# Altium PCB BooMo_ConV2.0.PcbDoc
Units mil, origin at the board's own origin, x right, y up, seen from the top; angles counter-clockwise.
Board outline 3937.01 x 3937.01 mil, 2 copper layers (Top Layer, Bottom Layer); 132 components, 111 nets, 512 pads, 168 vias.
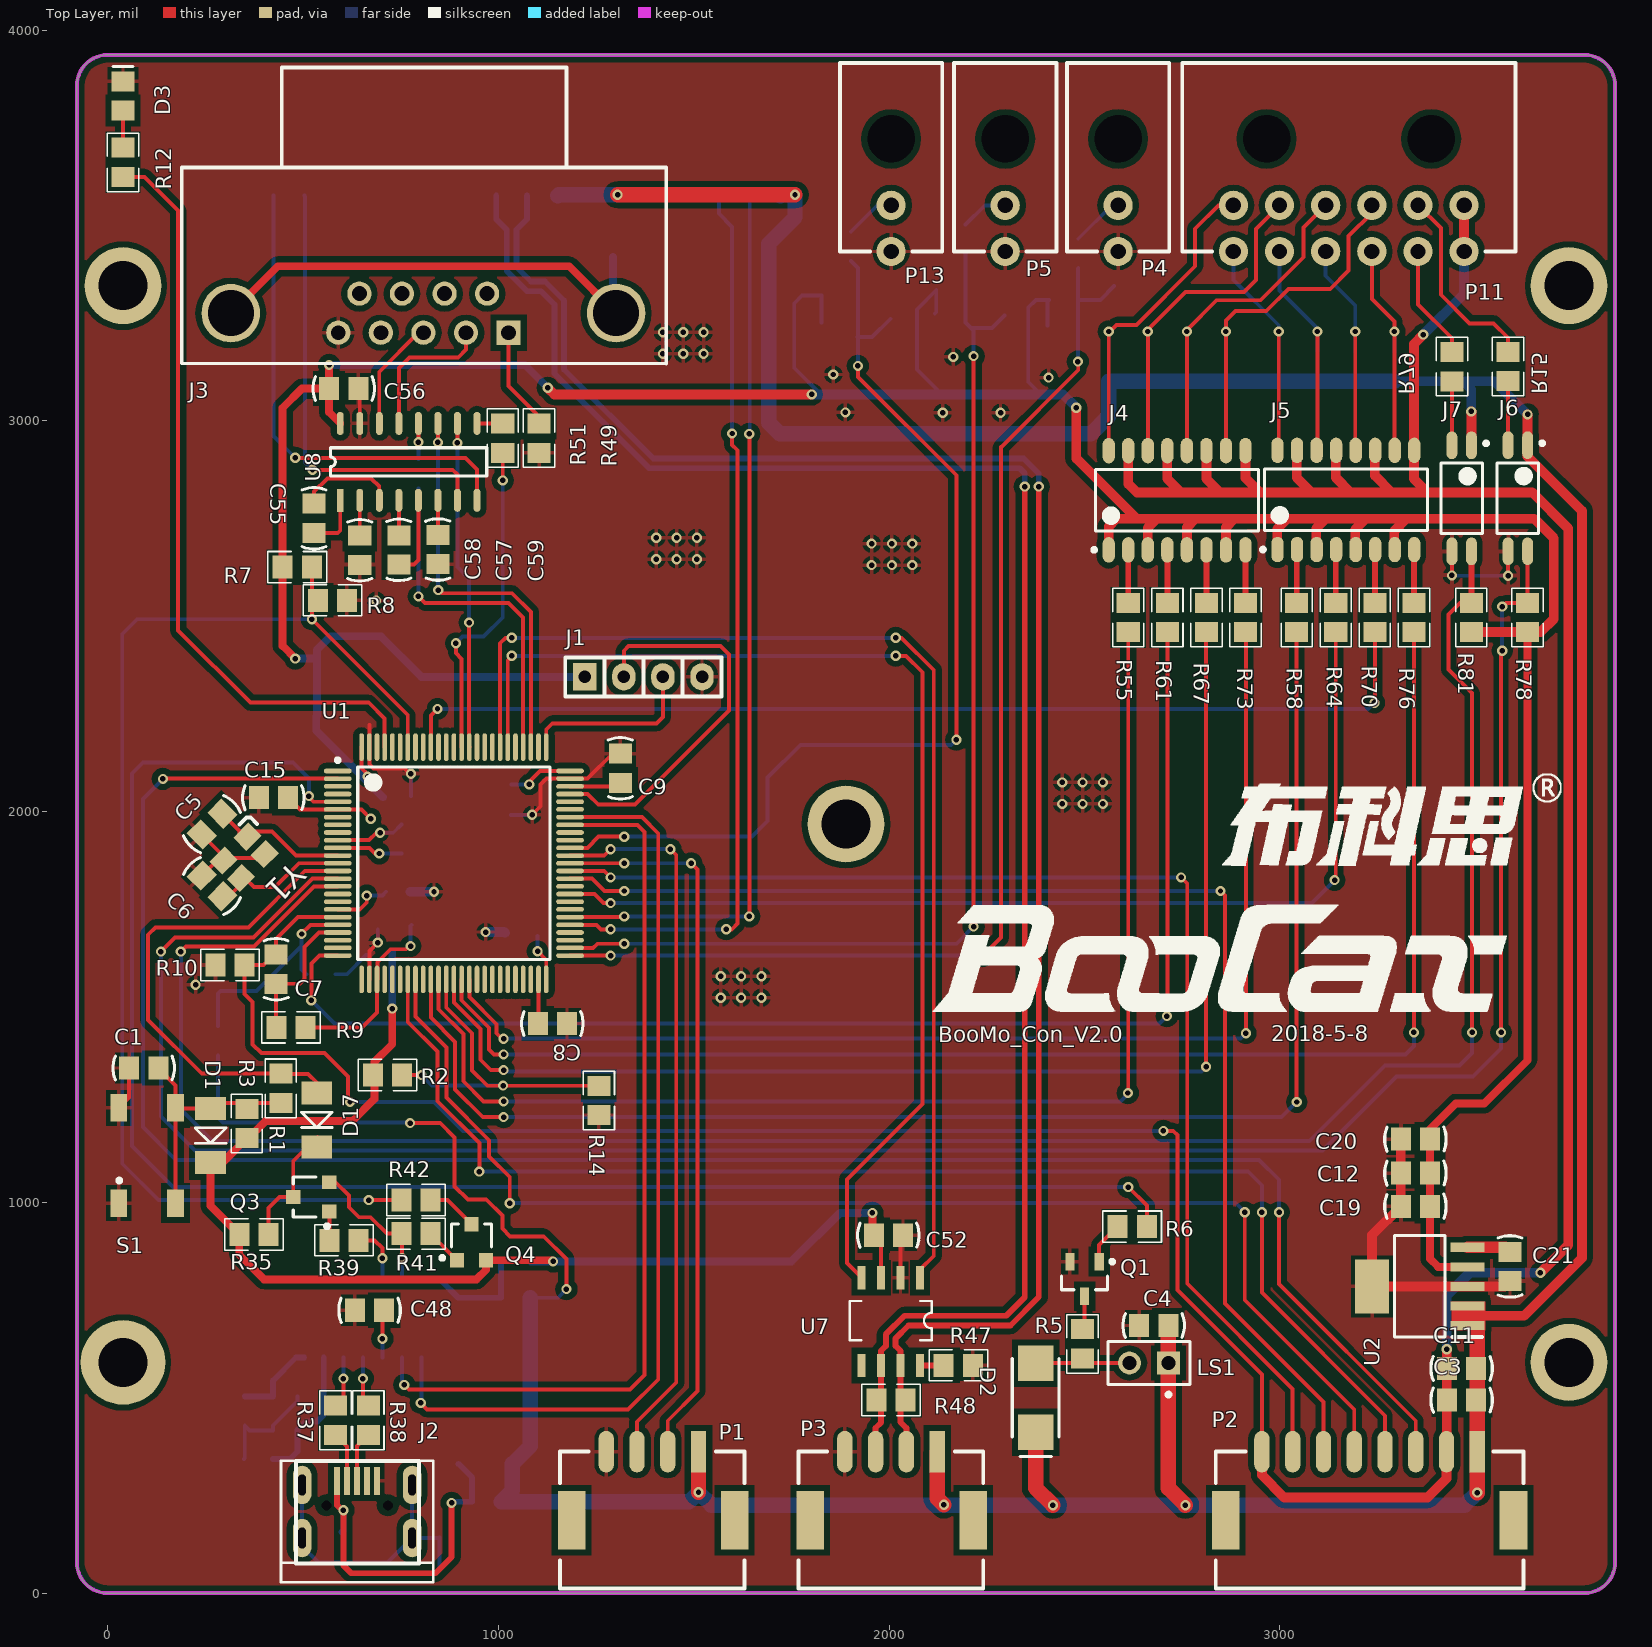
[diagram p0: Top Layer view]
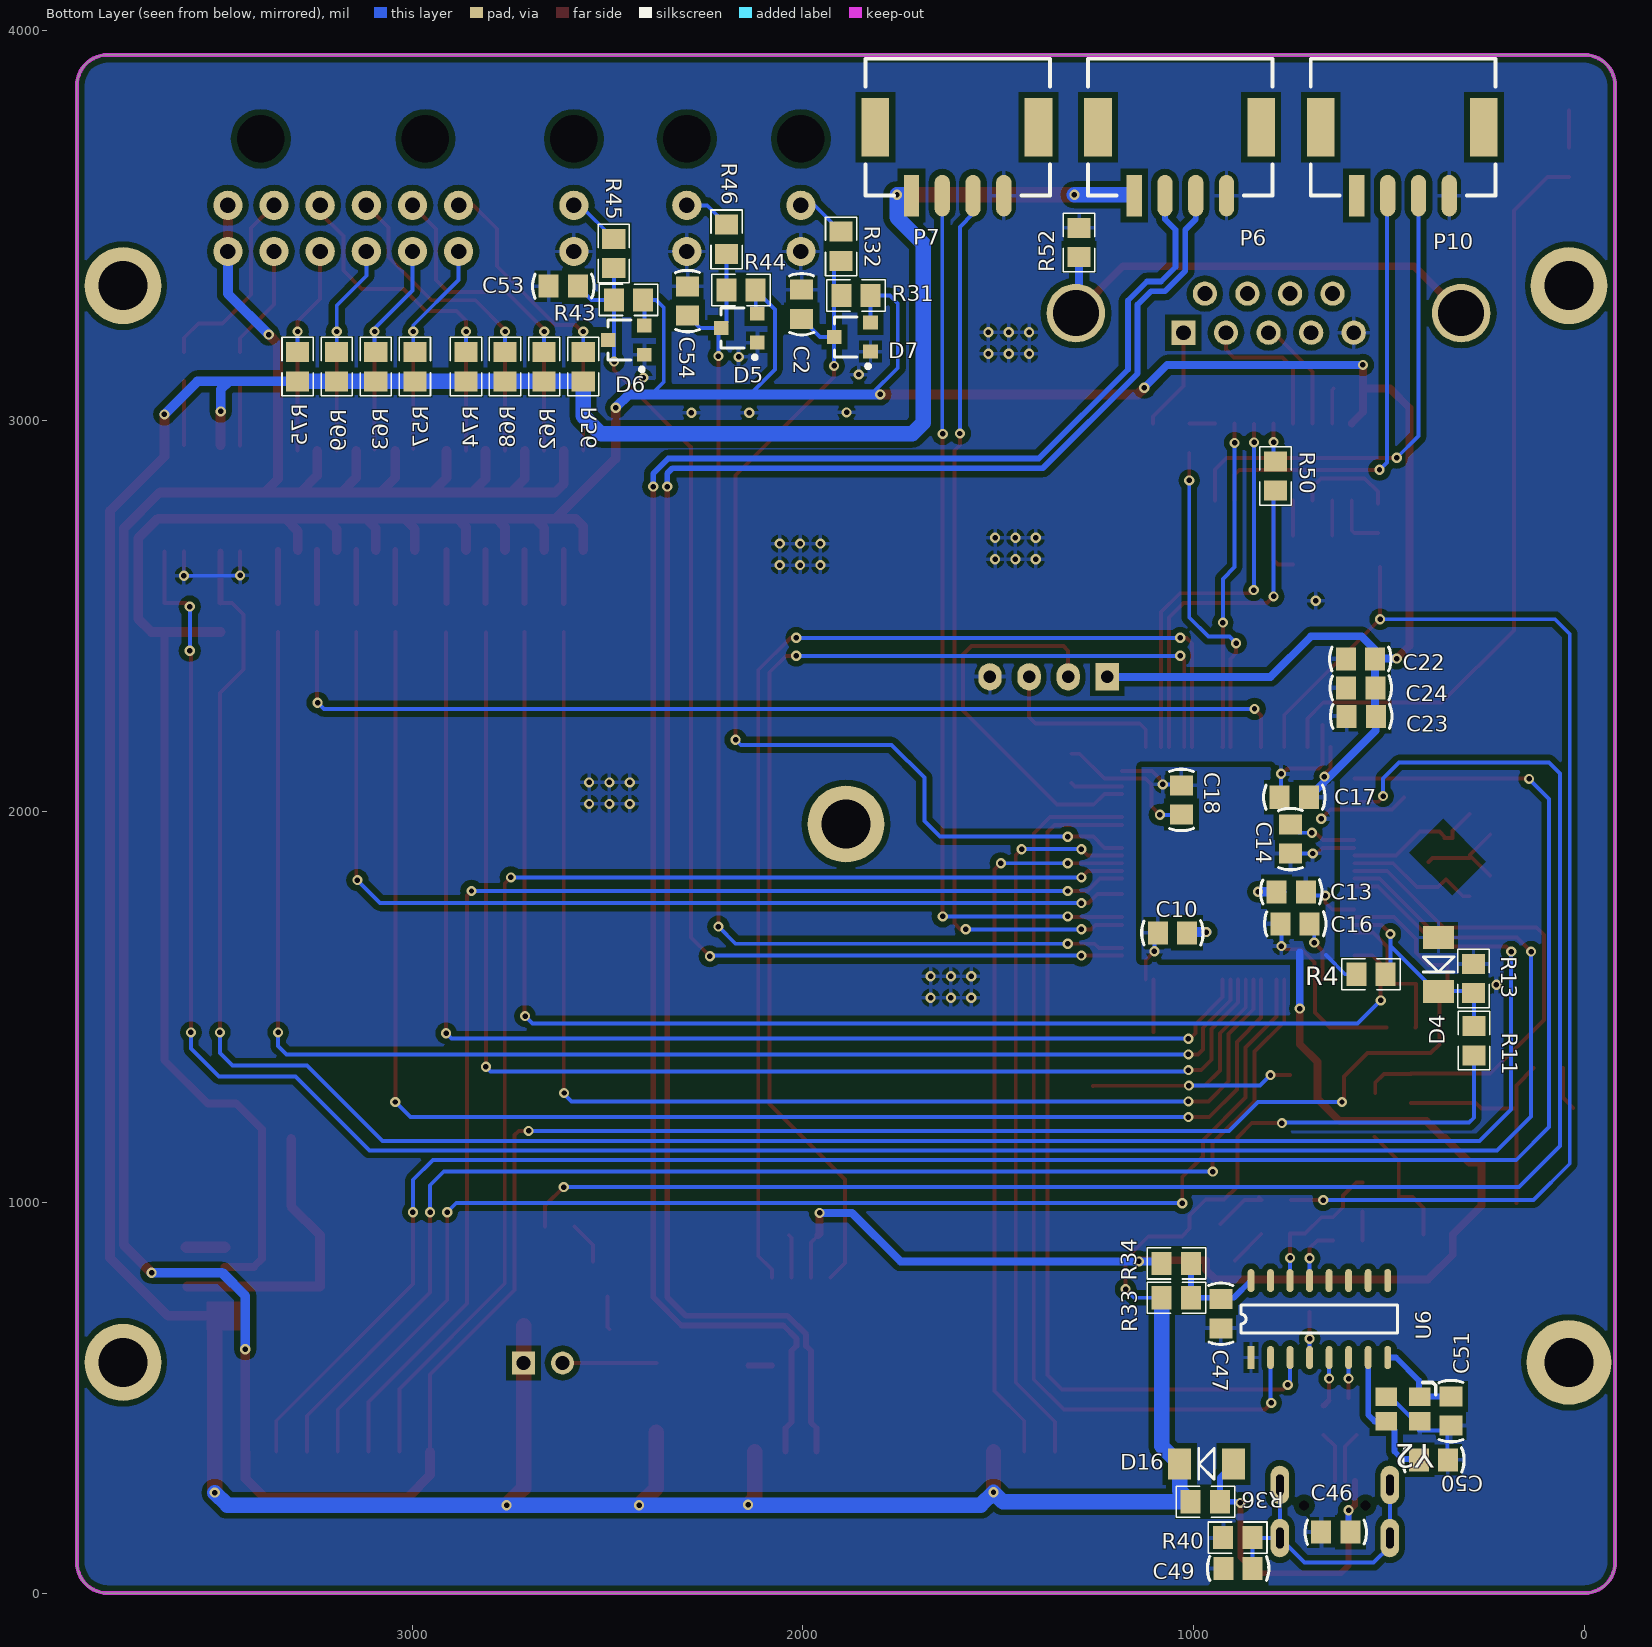
[diagram p1: Bottom Layer view, seen from below]

## Layer stack, top to bottom
Top Solder: solder mask 0.4, Solder Resist, Dk 3.5
Top Layer: signal copper 1.4
Dielectric1: prepreg 12.6, FR-4, Dk 4.8
Bottom Layer: signal copper 1.4
Bottom Solder: solder mask 0.4, Solder Resist, Dk 3.5

## Board outline
-78.74,78.74 -78.74,3858.27 cw(c0,3858.27) 0,3937.01 3779.53,3937.01 cw(c3779.53,3858.27) 3858.27,3858.27 3858.27,78.74 cw(c3779.53,78.74) 3779.53,0 0,0 cw(c0,78.74)

## Design rules (kind name [scope] priority, off if disabled: settings)
Clearance [All] p1: gap=7 except(10: Arc-Arc SMDPad-Via; 15: Arc-Poly Track-Poly SMDPad-Poly THPad-Poly Via-Poly Fill-Poly Poly-Poly)
ComponentClearance [All] p1 off: gap=10 collisioncheckmode=3 verticalgap=10 showdistances=FALSE
DiffPairsRouting [All] p1: maxlimit=10 minlimit=7 mostfreqgap=10 toplayer_minwidth=10 toplayer_maxwidth=15 toplayer_prefwidth=15 bottomlayer_minwidth=10 bottomlayer_maxwidth=15 bottomlayer_prefwidth=15 maxuncoupledlength=500
Height [All] p1: minheight=0 maxheight=2000 prefheight=500
HoleSize [All] p1: absolutevalues=TRUE maxlimit=500 minlimit=1 maxpercent=80.000 minpercent=20.000
HoleToHoleClearance [All] p1: gap=0 allowstackedmicrovias=TRUE
MinimumSolderMaskSliver [All] p1: minsoldermaskwidth=1
PlaneConnect [All] p1: planeconnectstyle=Direct reliefexpansion=20 reliefentries=4 reliefconductorwidth=10 reliefairgap=10
PolygonConnect G [InNet('GND')] p1: connectstyle=Direct reliefconductorwidth=10 reliefentries=4 polygonreliefangle="90 Angle" airgapwidth=10
PolygonConnect NETD4_2 [InNet('NetD4_2')] p2: connectstyle=Direct reliefconductorwidth=10 reliefentries=4 polygonreliefangle="90 Angle" airgapwidth=10
PolygonConnect NETD4 [InNet('NetC13_2')] p3: connectstyle=Direct reliefconductorwidth=10 reliefentries=4 polygonreliefangle="90 Angle" airgapwidth=10
PolygonConnect NETD3_2 [InNet('NetD3_2')] p4: connectstyle=Direct reliefconductorwidth=10 reliefentries=4 polygonreliefangle="90 Angle" airgapwidth=10
PolygonConnect RELAY_IN [InNet('RELAY_IN')] p5: connectstyle=Direct reliefconductorwidth=10 reliefentries=4 polygonreliefangle="90 Angle" airgapwidth=10
PolygonConnect VCC_24V [InNet('VCC_24V')] p6: connectstyle=Direct reliefconductorwidth=10 reliefentries=4 polygonreliefangle="90 Angle" airgapwidth=10
PolygonConnect BATTIN [InNet('BATTIN')] p7: connectstyle=Direct reliefconductorwidth=10 reliefentries=4 polygonreliefangle="90 Angle" airgapwidth=10
PolygonConnect [All] p8: connectstyle=Relief reliefconductorwidth=10 reliefentries=4 polygonreliefangle="90 Angle" airgapwidth=10
RoutingVias [All] p1: holewidth=28 width=40 viastyle="Through Hole" minholewidth=12 minwidth=26 maxholewidth=30 maxwidth=100
SilkToSilkClearance [All] p1: silktosilkclearance=0
SilkToSolderMaskClearance [IsPad] p1: minsilkscreentomaskgap=0 clearancetoexposedcopper=TRUE
SolderMaskExpansion [All] p1: expansion=4
Width [All] p1: maxlimit=500 minlimit=10 preferedwidth=30
Width Width_4 [InNet('VCC_CONTROL')] p2: maxlimit=110 minlimit=90 preferedwidth=100
Width Width_3 [InNet('VCC_B1')] p3: maxlimit=110 minlimit=90 preferedwidth=100
Width Width_2 [InNet('VCC_B')] p4: maxlimit=110 minlimit=90 preferedwidth=100
Width Width_1 [InNet('VCC_ALL')] p5: maxlimit=110 minlimit=90 preferedwidth=100
21 further rules are at their usual default settings.

## Classes and differential pairs
component class "Motor Control": J4 J5 J6 J7 J*1 P11 R15 R55 R56 R57 R58 R61 R62 R63 R64 R67 R68 R69 R70 R73 R74 R75 R76 R78 R79 R81
component class CONNECTOR: C2 C46 C47 C48 C49 C50 C51 C52 C53 C54 C55 C56 C57 C58 C59 D5 D6 D7 D16 D17 J2 J3 J8 J9 J10 P1 P3 P4 P5 P6 P7 P10 P13 Q3 Q4 R31 R32 R33 R34 R35 R36 R37 R38 R39 R40 R41 R42 R43 R44 R45 R46 R47 R48 R49 R50 R51 R52 U6 U7 U8 Y2 Z1 Z2
component class MCU: C1 C3 C4 C5 C6 C7 C8 C9 C10 C11 C12 C13 C14 C15 C16 C17 C18 C19 C20 C21 C22 C23 C24 D1 D2 D3 D4 J1 LS1 P2 Q1 R1 R2 R3 R4 R5 R6 R7 R8 R9 R10 R11 R12 R13 R14 S1 U1 U2 Y1
differential pair USB: +USB_P -USB_N
differential pair OSC_16: +OSC_16_P -OSC_16_N
differential pair CAN: +CAN_P -CAN_N

## Components (designator, comment, footprint, x,y, rotation, side; value= is the part's Value field where it differs from the comment)
C1 "100nF/±10%/50Vdc" C-RAD-0805 92.26,1344 r0 top
C2 "100nF/±10%/50Vdc" C-RAD-0805 2003.26,3299 r90 bottom
C3 "10uF/±10%/50Vdc" C-RAD-0805 3465.26,494 r0 top
C4 "4.7uF/±10%/50Vdc" C-RAD-0805 2677.26,685 r0 top
C5 "18pF/±10%/25Vdc" C-RAD-0805 267.26,1968 r45 top
C6 "18pF/±10%/25Vdc" C-RAD-0805 267.26,1810 r135 top
C7 "100nF/±10%/50Vdc" C-RAD-0805 431.26,1597 r270 top
C8 "2.2uF/±10%/50Vdc" C-RAD-0805 1138.26,1458 r0 top
C9 "2.2uF/±10%/50Vdc" C-RAD-0805 1312.26,2111 r90 top
C10 "100nF/±10%/50Vdc" C-RAD-0805 1054.26,1690 r180 bottom
C11 "100nF/±10%/50Vdc" C-RAD-0805 3465.26,575 r0 top
C12 "10uF/±10%/50Vdc" C-RAD-0805 3347.26,1075 r0 top
C13 "100nF/±10%/50Vdc" C-RAD-0805 750.26,1795 r0 bottom
C14 "100nF/±10%/50Vdc" C-RAD-0805 752.26,1930 r90 bottom
C15 "100nF/±10%/50Vdc" C-RAD-0805 424.26,2036 r180 top
C16 "100nF/±10%/50Vdc" C-RAD-0805 740.26,1713 r180 bottom
C17 "100nF/±10%/50Vdc" C-RAD-0805 742.26,2037 r0 bottom
C18 "100nF/±10%/50Vdc" C-RAD-0805 1031.26,2030 r270 bottom
C19 "10uF/±10%/50Vdc" C-RAD-0805 3347.26,990 r0 top
C20 "100nF/±10%/50Vdc" C-RAD-0805 3347.26,1162 r0 top
C21 "100nF/±10%/50Vdc" C-RAD-0805 3589.26,836 r90 top
C22 "10uF/±10%/50Vdc" C-RAD-0805 573.26,2391 r0 bottom
C23 "4.7uF/±10%/50Vdc" C-RAD-0805 571.26,2244 r0 bottom
C24 "4.7uF/±10%/50Vdc" C-RAD-0805 572.26,2317 r0 bottom
C46 "10uF/±10%/50Vdc" C-RAD-0805 636.26,156 r0 bottom
C47 "1uF/±10%/50Vdc" C-RAD-0805 930.26,715 r270 bottom
C48 "100nF/±10%/50Vdc" C-RAD-0805 670.26,724 r180 top
C49 "Cap" C-RAD-0805 886.26,63 r0 bottom
C50 "15pF/±10%/50Vdc" C-RAD-0805 386.26,341 r180 bottom
C51 "15pF/±10%/50Vdc" C-RAD-0805 341.26,466 r270 bottom
C52 "100nF/±10%/50Vdc" C-RAD-0805 1998.26,916 r180 top
C53 "100nF/±10%/50Vdc" C-RAD-0805 2613.26,3345 r0 bottom
C54 "100nF/±10%/50Vdc" C-RAD-0805 2295.26,3307 r90 bottom
C55 "100nF/±10%/50Vdc" C-RAD-0805 528.26,2751 r90 top
C56 "100nF/±10%/50Vdc" C-RAD-0805 604.26,3083 r180 top
C57 "100nF/±10%/50Vdc" C-RAD-0805 745.26,2670 r270 top
C58 "100nF/±10%/50Vdc" C-RAD-0805 645.26,2669 r90 top
C59 "100nF/±10%/50Vdc" C-RAD-0805 845.26,2671 r90 top
D1 "1N4148W" DIODE-1206 263.26,1240 r270 top
D2 "Diode-Schottky" DIODE-SMA 2375.26,500 r270 top
D3 "LED0" LED_0805 39.26,3832 r90 top
D4 "Diode-Z" DIODE-1206 373.26,1678 r270 bottom
D5 "BAT54S" SOT-23 2163.26,3238 r90 bottom
D6 "BAT54S" SOT-23 2452.26,3207 r90 bottom
D7 "BAT54S" SOT-23 1873.26,3215 r90 bottom
D16 "1N4148W" DIODE-1206 898.01,330.78 r0 bottom
D17 "1N4148W" DIODE-1206 535.26,1280 r270 top
J1 "JTAG" PORT-SIP4-2.54 1271.26,2345 r0 top
J2 "USB-MICRO" USB-MICRO-1 638.51,208.91 r0 top
J3 "DB9_male" DB9-M 1026.26,3226 r180 top locked
J4 "TLP291-4" SOIC127P700X210-16N 2737.26,2797.09 r90 top
J5 "TLP291-4" SOIC127P700X210-16N 3169.26,2798 r90 top
J6 "TLP291" SOP127P710X350-4N 3609.26,2802.31 r270 top
J7 "TLP291" SOP127P710X350-4N 3465.57,2802 r270 top
LS1 "Bell" PIN2 2715.26,589 r180 top
P1 "Header 4" SM04B-PBV 1512.26,362 r180 top
P2 "Header 8" SM08B-PBV 3505.48,362 r180 top
P3 "Header 4" SM04B-PBV 2123,362 r180 top
P4 "Header 2" MOLEX-2P 2586.26,3552 r180 top
P5 "Header 2" MOLEX-2P 2297.26,3552 r180 top
P6 "Header 4" SM04B-PBV 1152.06,3576.8 r180 bottom
P7 "Header 4" SM04B-PBV 1722.06,3576.8 r180 bottom
P10 "Header 4" SM04B-PBV 582.06,3576.8 r180 bottom
P11 "Header 6X2A" Molex-12P 2881.26,3552 r180 top
P13 "Header 2" MOLEX-2P 2005.26,3552 r180 top
Q1 "BC817" SOT-23_N 2500.26,804 r270 top
Q3 "SS8050" SOT-23 521.26,1014 r90 top
Q4 "SS8550" SOT-23 931.26,898 r0 top
R1 "33R 5% 1/16W 0805" 0805-1 443.26,1292 r270 top
R2 "10K 5% 1/16W 0805(NC)" 0805-1 716.26,1326 r0 top
R3 "10K 5% 1/16W 0805" 0805-1 356.26,1202 r270 top
R4 "0R 5% 1/16W 0805(NC)" 0805-1 546.26,1584 r0 bottom
R5 "33R 5% 1/16W 0805" 0805-1 2495.26,638 r90 top
R6 "1K 5% 1/16W 0805" 0805-1 2622.26,938 r0 top
R7 "10K 5% 1/16W 0805" 0805-1 485.26,2626 r0 top
R8 "10K 5% 1/16W 0805(NC)" 0805-1 575.26,2541 r0 top
R9 "0R 5% 1/16W 0805" 0805-1 469.26,1448 r0 top
R10 "0R 5% 1/16W 0805" 0805-1 313.26,1607.4 r180 top
R11 "10K 5% 1/16W 0805(NC)" 0805-1 282.66,1414 r270 bottom
R12 "1K 5% 1/16W 0805" 0805-1 39.26,3662 r270 top
R13 "5.1K 5% 1/16W 0805(NC)" 0805-1 283.66,1573 r270 bottom
R14 "10K 5% 1/16W 0805(NC)" 0805-1 1257.26,1261 r270 top
R15 "1K 5% 1/16W 0805" 0805-1 3584.26,3139.31 r270 top
R31 "10K 5% 1/16W 0805" 0805-1 1864.26,3321 r180 bottom
R32 "33R 5% 1/16W 0805" 0805-1 1902.26,3447 r270 bottom
R33 "0R 5% 1/16W 0805(NC)" 0805-1 1044.26,756 r180 bottom
R34 "0R 5% 1/16W 0805" 0805-1 1044.26,844 r180 bottom
R35 "10K 5% 1/16W 0805" 0805-1 374.26,918 r0 top
R36 "0R 5% 1/16W 0805(NC)" 0805-1 970.01,233.78 r0 bottom
R37 "33R 5% 1/16W 0805" 0805-1 583.26,442.4 r90 top
R38 "33R 5% 1/16W 0805" 0805-1 667.26,442.4 r90 top
R39 "1K 5% 1/16W 0805" 0805-1 605.26,903 r0 top
R40 "1M 5% 1/16W 0805(NC)" 0805-1 887.26,142 r180 bottom
R41 "1K 5% 1/16W 0805" 0805-1 789.26,920 r180 top
R42 "1K 5% 1/16W 0805" 0805-1 788.86,1006 r180 top
R43 "10K 5% 1/16W 0805" 0805-1 2446.26,3310 r180 bottom
R44 "10K 5% 1/16W 0805" 0805-1 2158.26,3335 r180 bottom
R45 "33R 5% 1/16W 0805" 0805-1 2484.26,3429 r270 bottom
R46 "33R 5% 1/16W 0805" 0805-1 2195.26,3465 r270 bottom
R47 "10K 5% 1/16W 0805" 0805-1 2177.26,583 r0 top
R48 "120R 5% 1/16W 0805" 0805-1 2005.26,494 r180 top
R49 "0R 5% 1/16W 0805" 0805-1 1104.26,2956 r90 top
R50 "33R 5% 1/16W 0805" 0805-1 790.26,2859 r270 bottom
R51 "33R 5% 1/16W 0805" 0805-1 1011.26,2956 r270 top
R52 "0R 5% 1/16W 0805" 0805-1 1293.26,3457 r270 bottom
R55 "1K 5% 1/16W 0805" 0805-1 2612.26,2497 r270 top
R56 "1K 5% 1/16W 0805" 0805-1 2562.26,3139 r270 bottom
R57 "1K 5% 1/16W 0805" 0805-1 2993.26,3139 r270 bottom
R58 "1K 5% 1/16W 0805" 0805-1 3043.26,2497 r270 top
R61 "1K 5% 1/16W 0805" 0805-1 2712.26,2497 r270 top
R62 "1K 5% 1/16W 0805" 0805-1 2662.26,3139 r270 bottom
R63 "1K 5% 1/16W 0805" 0805-1 3093.26,3139 r270 bottom
R64 "1K 5% 1/16W 0805" 0805-1 3143.26,2497 r270 top
R67 "1K 5% 1/16W 0805" 0805-1 2812.26,2497 r270 top
R68 "1K 5% 1/16W 0805" 0805-1 2762.26,3139 r270 bottom
R69 "1K 5% 1/16W 0805" 0805-1 3193.26,3139 r270 bottom
R70 "1K 5% 1/16W 0805" 0805-1 3243.26,2497 r270 top
R73 "1K 5% 1/16W 0805" 0805-1 2912.26,2497 r270 top
R74 "1K 5% 1/16W 0805" 0805-1 2862.26,3139 r270 bottom
R75 "1K 5% 1/16W 0805" 0805-1 3293.26,3139 r270 bottom
R76 "1K 5% 1/16W 0805" 0805-1 3343.26,2497 r270 top
R78 "1K 5% 1/16W 0805" 0805-1 3634.26,2497 r270 top
R79 "1K 5% 1/16W 0805" 0805-1 3440.58,3139 r270 top
R81 "1K 5% 1/16W 0805" 0805-1 3490.26,2497 r270 top
S1 "SW-PB4" RESET-SMD-1O4 101.26,1120 r90 top
U1 "STM32F407VG" 100T1_N 886.26,1868 r0 top locked
U2 "TPS78633DCQR" SOT-223-G6 3358.26,785 r180 top
U6 "CH340G" SOP16 853.26,603 r90 bottom
U7 "SN65HVD230" SO8-SN65HVD230 2004.26,695 r180 top
U8 "MAX3232ESE" SOP16 595.26,2797 r90 top
Y1 "XTAL-16M" EPSON-16M 349.26,1883 r225 top
Y2 "XTAL-12M" EPSON-16M 464.26,471 r0 bottom

## Footprints (in the part's own frame and the unit in brackets; to place one, negate y for a bottom-side part, rotate by r counter-clockwise, add the part's x,y. Pads: shape width x height; smd on the part's side, far side on the other; paste and mask are expansions set on the pad)
100T1_N [mm] "Thin QFP, 100-Leads, Body 14x14mm, Pitch 0.5mm, IPC Medium Density"
  oval 1.8x0.3 smd: 1(-7.55,6) 2(-7.55,5.5) 3(-7.55,5) 4(-7.55,4.5) 5(-7.55,4) 6(-7.55,3.5) 7(-7.55,3) 8(-7.55,2.5) 9(-7.55,2) 10(-7.55,1.5) 11(-7.55,1) 12(-7.55,0.5) 13(-7.55,0) 14(-7.55,-0.5) 15(-7.55,-1) 16(-7.55,-1.5) 17(-7.55,-2) 18(-7.55,-2.5) 19(-7.55,-3) 20(-7.55,-3.5) 21(-7.55,-4) 22(-7.55,-4.5) 23(-7.55,-5) 24(-7.55,-5.5) 25(-7.55,-6) 51(7.55,-6) 52(7.55,-5.5) 53(7.55,-5) 54(7.55,-4.5) 55(7.55,-4) 56(7.55,-3.5) 57(7.55,-3) 58(7.55,-2.5) 59(7.55,-2) 60(7.55,-1.5) 61(7.55,-1) 62(7.55,-0.5) 63(7.55,0) 64(7.55,0.5) 65(7.55,1) 66(7.55,1.5) 67(7.55,2) 68(7.55,2.5) 69(7.55,3) 70(7.55,3.5) 71(7.55,4) 72(7.55,4.5) 73(7.55,5) 74(7.55,5.5) 75(7.55,6)
  oval 0.3x1.8 smd: 26(-6,-7.55) 27(-5.5,-7.55) 28(-5,-7.55) 29(-4.5,-7.55) 30(-4,-7.55) 31(-3.5,-7.55) 32(-3,-7.55) 33(-2.5,-7.55) 34(-2,-7.55) 35(-1.5,-7.55) 36(-1,-7.55) 37(-0.5,-7.55) 38(0,-7.55) 39(0.5,-7.55) 40(1,-7.55) 41(1.5,-7.55) 42(2,-7.55) 43(2.5,-7.55) 44(3,-7.55) 45(3.5,-7.55) 46(4,-7.55) 47(4.5,-7.55) 48(5,-7.55) 49(5.5,-7.55) 50(6,-7.55) 76(6,7.55) 77(5.5,7.55) 78(5,7.55) 79(4.5,7.55) 80(4,7.55) 81(3.5,7.55) 82(3,7.55) 83(2.5,7.55) 84(2,7.55) 85(1.5,7.55) 86(1,7.55) 87(0.5,7.55) 88(0,7.55) 89(-0.5,7.55) 90(-1,7.55) 91(-1.5,7.55) 92(-2,7.55) 93(-2.5,7.55) 94(-3,7.55) 95(-3.5,7.55) 96(-4,7.55) 97(-4.5,7.55) 98(-5,7.55) 99(-5.5,7.55) 100(-6,7.55)
  silkscreen extent -7.67,-6.25 6.25,6.82, body extent -7,-7 7,7, height 1.05
0805-1 [mm] "贴片带丝印"
  rect 1.3x1.5 smd: 1(-0.95,0) 2(0.95,0)
  silkscreen extent -1.91,-1.02 1.91,1.02, body extent -1.14,-0.51 1.14,0.51, height 1
C-RAD-0805 [mm] "贴片电容"
  rect 1.3x1.5 smd: 1(-0.95,0) 2(0.95,0)
  silkscreen extent -2,-0.79 2,0.79, body extent -1.27,-0.64 1.27,0.64, height 0.9
DB9-M [mil] "DB9公座"
  rect 62x62 hole 38: 1(0,0)
  round 62 hole 38: 2(109,0) 3(218,0) 4(327,0) 5(436,0) 6(55,-100) 7(164,-100) 8(273,-100) 9(382,-100)
  round 150 hole 118.11: 10(711,-50) 11(-275,-50)
  silkscreen extent -404,-679 837,79, body extent -405,-680 835,75, height 394
DIODE-1206 [mm] "玻璃封装二极管"
  rect 1.5x2 smd: 1(0,0) 2(3.5,0)
  silkscreen extent 1.25,-1 2.25,1
DIODE-SMA [mm] "贴片二极管"
  rect 2.3x2.3 smd: 1(-2.25,0) 2(2.25,0)
  silkscreen extent -2.54,-1.52 3.81,1.52, body extent -2.92,-1.4 2.92,1.4, height 3
EPSON-16M [mm] "晶振 3.2*2.5mm"
  rect 1.4x1.2 smd: 1(-1.1,-0.8) 2(1.1,-0.8) 3(1.1,0.8) 4(-1.1,0.8)
  silkscreen extent -2.13,-1.73 -1.3,-0.94, body extent -1.6,-1.25 1.6,1.25, height 0.7
LED_0805 [mm] "贴片二极管"
  rect 1.3x1.5 smd: 1(-0.95,0) 2(0.95,0)
  silkscreen extent 1.91,-0.64 1.91,0.63
MOLEX-2P [mm]
  round 0 hole 3.1: 0(0,-4.32)
  round 1.9 hole 1: 1(0,0) 2(0,3)
  silkscreen extent -3.32,-9.24 3.32,3, body extent -3.33,-9.22 3.33,0, height 7.37
Molex-12P [mm]
  round 0 hole 3.1: 0(-12.86,-4.32) 0(-2.16,-4.32)
  round 1.9 hole 1: 1(0,0) 2(-3,0) 3(-6,0) 4(-9,0) 5(-12,0) 6(-15,0) 7(0,3) 8(-3,3) 9(-6,3) 10(-9,3) 11(-12,3) 12(-15,3)
  silkscreen extent -18.34,-9.24 3.32,3, body extent -18.34,-9.25 3.33,0, height 7.37
PIN2 [mm] "Photosensitive Diode; 2 Leads"
  rect 1.5x1.5 hole 0.9: 1(0,0)
  round 1.5 hole 0.9: 2(2.54,0)
  silkscreen extent -1.4,-1.4 3.94,2.17
PORT-SIP4-2.54 [mil]
  rect 60x70 hole 32: 1(-50,0)
  oval 60x70 hole 32: 2(50,0) 3(150,0) 4(250,0)
  silkscreen extent -100,-50 300,50
RESET-SMD-1O4 [mm]
  rect 1.8x1.1 smd: 1(-3.1,1.85) 2(-3.1,-1.85) 3(3.1,-1.85) 4(3.1,1.85)
  silkscreen extent -1.75,1.7 -1.5,1.95, body extent -4.07,-2.52 4.11,2.42, height 1.1
SM04B-PBV [mm]
  rect 1.8x3.8 smd: 0(-2.35,4.45) 0(8.25,4.45)
  rect 1x2.7 smd: 1(0,0)
  oval 1x2.7 smd: 2(2,0) 3(4,0) 4(6,0)
  silkscreen extent -3,0 9,8.9
SM08B-PBV [mm]
  rect 1.8x3.8 smd: 0(-2.35,4.45) 0(16.35,4.45)
  rect 1x2.7 smd: 1(0,0)
  oval 1x2.7 smd: 2(2,0) 3(4,0) 4(6,0) 5(8,0) 6(10,0) 7(12,0) 8(14,0)
  silkscreen extent -3,0 17,8.9
SO8-SN65HVD230 [mil]
  rect 20x60 smd: 1(-75,-112.5) 2(-25,-112.5) 3(25,-112.5) 4(75,-112.5) 5(75,112.5) 6(25,112.5) 7(-25,112.5) 8(-75,112.5)
  silkscreen extent -105,-53 105,48
SOIC127P700X210-16N [mm] "SOIC, 16-Leads, Body 10.35x4.60mm, Pitch 1.27mm, IPC Medium Density"
  oval 1.65x0.8 smd: 1(-3.225,4.445) 2(-3.225,3.175) 3(-3.225,1.905) 4(-3.225,0.635) 5(-3.225,-0.635) 6(-3.225,-1.905) 7(-3.225,-3.175) 8(-3.225,-4.445) 9(3.225,-4.445) 10(3.225,-3.175) 11(3.225,-1.905) 12(3.225,-0.635) 13(3.225,0.635) 14(3.225,1.905) 15(3.225,3.175) 16(3.225,4.445)
  silkscreen extent -3.35,-5.3 2,5.52, body extent -2.4,-5.3 2.4,5.3, height 2.1
SOP16 [mm]
  rect 1.5x0.45 smd: 1(0,0)
  oval 1.5x0.45 smd: 2(0,-1.27) 3(0,-2.54) 4(0,-3.81) 5(0,-5.08) 6(0,-6.35) 7(0,-7.62) 8(0,-8.89) 9(5,-8.89) 10(5,-7.62) 11(5,-6.35) 12(5,-5.08) 13(5,-3.81) 14(5,-2.54) 15(5,-1.27) 16(5,0)
  silkscreen extent 1.58,-9.53 3.42,0.63, body extent 0.89,-9.4 4.19,0.51, height 1.8
SOP127P710X350-4N [mm] "SOP, 4-Leads, Body 2.7x4.5mm (max), Pitch 1.27mm, IPC Medium Density"
  oval 1.8x0.7 smd: 1(-3.448,0.635) 2(-3.448,-0.635) 3(3.448,-0.635) 4(3.448,0.635)
  silkscreen extent -3.7,-1.35 2.29,1.71, body extent -2.76,-1.35 2.79,1.35, height 3.5
SOT-23 [mm]
  rect 0.9x0.95 smd: 1(-0.95,-1.175) 2(0.95,-1.175) 3(0,1.175)
  silkscreen extent -2.03,-1.14 1.3,1.18
SOT-23_N [mm] "SOT23, 3-Leads, Body 2.9x1.3mm, Pitch 0.95mm, Lead Span 2.5mm, IPC Medium Density"
  rect 1.15x0.6 smd: 1(-1.125,0.95) 2(-1.125,-0.95) 3(1.125,0)
  silkscreen extent -1.25,-1.5 0.7,1.93, body extent -0.7,-1.5 0.7,1.5, height 1.1
SOT-223-G6 [mm] "TPS786 Ultralow-Noise, High-PSRR, Fast, RF, 1.5-A  Low-Dropout Linear Regulators"
  rect 2.2x0.6 smd: 1(-3.1,2.54) 2(-3.1,1.27) 3(-3.1,0) 4(-3.1,-1.27) 5(-3.1,-2.54)
  rect 2.2x3.5 smd: 6(3.1,0)
  silkscreen extent -4.03,-3.3 1.65,3.3, body extent -1.77,-3.28 1.77,3.27, height 1.8
USB-MICRO-1 [mm]
  oval 1.2x2.5 hole 0.5 slot 1.35 at 90 deg: 0(-3.575,-1.725) 0(-3.575,1.725) 0(3.575,-1.725) 0(3.575,1.725)
  round 0 hole 0.65: 0(-2,0.4) 0(2,0.4)
  rect 0.4x1.824 smd: 1(-1.3,1.987) 2(-0.65,1.987) 3(0,1.987) 4(0.65,1.987) 5(1.3,1.987)
  silkscreen extent -4.95,-4.6 4.95,3.3

## Part data
C1 C5 C6: library part Cap, "无极性电容"
C2 C3 C4 C7 C8 C9 C10 C11 C13 C14 C15 C16 C17 C18 C20 C21 C22 C23 C24 C46 C47 C48 C50 C51 C52 C53 C54 C55 C56 C57 C58 C59: library part Cap, "Capacitor"
C12 C19: library part Cap, "Capacitor,33uF / ESR 1.69m /10Vdc,C2012X5R1A336M125AC"
C49: "Capacitor"
D1 D16 D17: library part Diode, "二极管"
D2: "肖特基二极管"
D3: "发光二极管"
D4: "稳压二极管"
D5 D6 D7: "双向肖特基二极管"
J1: library part Conn_1*4_1
J3: library part "D Connector 9", "串口"
J4 J5 J6 J7: "光耦"
LS1: "Electrical Bell"
P1 P3 P4 P5 P6 P7 P10 P13: "接插件"
P2: "Header, 8-Pin"
P11: "Header, 6-Pin, Dual row"
Q1: library part mNPN, "NPN 45V 功耗 310mW"
Q3: "NPN贴片三极管"
Q4: "PNP贴片三极管"
R1 R3 R36 R37 R38 R40: library part Res1, "贴片电阻"
R2 R4 R5 R6 R7 R8 R9 R10 R11 R12 R13 R14 R15 R31 R32 R35 R39 R41 R42 R43 R44 R45 R46 R47 R48 R49 R50 R51 R52 R55 R56 R57 R58 R61 R62 R63 R64 R67 R68 R69 R70 R73 R74 R75 R76 R78 R79 R81: library part Res1, "Resistor"
R33 R34: library part RES
S1: "微动开关"
U1: "主控MCU"
U2: "3.3V稳压芯片 1.5A输出"
U6: "串口转USB芯片"
U7: library part SN65HVD230D
U8: "+5V Powered, Multi-Channel RS-232 Driver/Receiver"
Y1 Y2: library part XTAL-4PIN, "晶振"

## Free pads (board coordinates)
  round 216.54 hole 125.98: 0(39.37,590.55)
  round 196.85 hole 125.98: 0(39.37,3346.46) 0(1889.76,1968.5) 0(3740.16,590.55) 0(3740.16,3346.46)

## Via types
v1: diameter 26, hole 14, Top Layer to Bottom Layer, tented both sides, 165 vias
v2: diameter 26, hole 14, Top Layer to Bottom Layer, 3 vias

## Nets (pads, with @x,y where several pads share a name; then routed paths per layer and width w, separated by ;. In a path a pad name is that pad's centre, name@x,y a point inside that pad or via, vN(x,y) a via of type N, cw(c..) or ccw(c..) an arc to the next point about the centre after c; other vN are vias at no path point)
5V_CONTROL: P2.6 U1.61 | length 3222
  Top Layer w10: U1.61 1239.63,1828.63 1271.26,1797 v1(1322.26,1797) ; v1(2848.26,1797) 2860.26,1785 2860.26,741 3111.78,489.48 P2.6
  Bottom Layer w10: v1(1322.26,1797) v1(2848.26,1797)
12V_CONTROL: P2.7 U1.62 | length 3158.9
  Top Layer w10: U1.62 1270.94,1848.31 v1(1287.26,1832) ; v1(2747.26,1832) 2763.26,1816 2763.26,792 3033.04,522.22 P2.7
  Bottom Layer w10: v1(1287.26,1832) v1(2747.26,1832)
AGND: C3.1 C7.1 C11.1 J4.9 J4.11 J4.13 J4.15 J5.9 J5.11 J5.13 J5.15 P2.2 P2.8 P11.6 P11.12 R10.1 U1.20 | length 9958.1
  Top Layer w10: U1.20 487.46,1730.2 431.26,1674 431.26,1639.5 399.16,1607.4 R10.1 350.66,1533.4 371.06,1513 371.06,1404.2 393.26,1382 555.26,1382 615.26,1322 615.26,1262 v1(620.26,1257) ; v1(2702.26,1183) 2727.26,1183 2738.26,1172 2738.26,776 2954.3,559.96 P2.8 ; P2.2 P2.2@3426.74,362.52
  Top Layer w25: J4.15 2612.26,2839 2634.26,2817 2747.26,2817 ; J4.13 2712.26,2852 2747.26,2817 ; J4.11 2812.26,2852 2847.26,2817 ; J4.9 2912.26,2854 2949.01,2817.25 2948.76,2817 2847.26,2817 ; 2949.26,2817 3081.26,2817 ; P2.8 2954.3,301.96 3011.26,245 3378.26,245 3426.74,293.48 P2.2 ; J5.15@3043.26,2924.06 3043.26,2855 3081.26,2817 ; J5.13@3143.26,2924.06 3143.26,2855 3181.26,2817 ; J5.11@3243.26,2924.06 3243.26,2860 3286.26,2817 ; v1(3367.26,3221) 3343.26,3197 3343.26,2852 3378.26,2817 ; P2.2@3427.26,362.52 v1(3427.26,624) ; P11.12 P11.6 ; v1(3667.26,820) 3738.26,891 3738.26,2725 3646.26,2817 3378.26,2817 ; 2747.26,2817 2847.26,2817 ; 3081.26,2817 3181.26,2817 ; 3181.26,2817 3286.26,2817 ; 3286.26,2817 3378.26,2817
  Bottom Layer w10: v1(620.26,1257) 835.26,1257 909.26,1183 v1(2702.26,1183)
  Bottom Layer w25: v1(3367.26,3221) 3471.81,3325.55 P11.12 ; v1(3427.26,624) 3427.26,761 3486.26,820 v1(3667.26,820)
AVCC_3V3: C7.2 R9.1 U1.22 | length 372
  Top Layer w10: R9.1 431.26,1448.6 C7.2 491.86,1559.6 504.26,1572 504.26,1654 541.09,1690.83 U1.22
B-STOP: C2.1 D7.3 R31.1 R32.2 U1.65 | length 2608.8
  Top Layer w10: U1.65 1227.63,1907.37 1256.26,1936 v1(1322.26,1936) ; v1(1920.26,3141) 1920.26,3113 2172.26,2861 v1(2172.26,2184)
  Bottom Layer w10: v1(1322.26,1936) 1649.26,1936 1689.26,1976 1689.26,2087 1773.26,2171 2159.26,2171 v1(2172.26,2184) ; R32.2 1920.26,3391.6 D7.3@1920.26,3215 ; D7.3 D7.3@1920.26,3215 ; v1(1920.26,3141) D7.3@1920.26,3215 ; C2.1 1956.66,3215 D7.3@1920.26,3215
BELL_CONTROL: R6.2 U1.5 | length 4276.2
  Top Layer w10: v1(515.26,2040) 515.26,2037 526.78,2025.48 U1.5 ; v1(2612.26,1039) 2659.66,991.6 R6.2
  Bottom Layer w10: v1(515.26,2040) 515.26,2085 474.26,2126 90.26,2126 62.26,2098 62.26,1144 167.26,1039 v1(2612.26,1039)
BK_L: R55.2 U1.36 | length 3204.3
  Top Layer w10: U1.36 846.89,1494.37 910.26,1431 910.26,1310 961.83,1258.43 v1(1013.26,1258.43) ; v1(2611.26,1280) v1@2612.26,1281 ; R55.2 v1@2612.26,1281 ; v1@2615.26,1284 v1@2612.26,1281
  Bottom Layer w10: v1(1013.26,1258.43) 2592.69,1258.43 2611.26,1277 v1(2611.26,1280)
BK_OUT_L: J4.16 P11.1 R56.1 | length 864.8
  Top Layer w10: J4.16 2562.26,3226 2582.26,3246 2633.26,3246 2783.26,3396 2783.26,3492 2843.26,3552 P11.1
  Bottom Layer w10: R56.1 v1(2562.26,3229)
BK_OUT_R: J5.16 P11.7 R57.1 | length 602.5
  Top Layer w10: J5.16@2997.26,2928.06 v1(2997.26,3229) v1@2997.26,3230
  Bottom Layer w10: P11.7 2881.26,3361 2997.26,3245 v1@2997.26,3230 ; R57.1@2997.26,3180.4 v1(2997.26,3229)
BK_R: R58.2 U1.35 | length 3709.4
  Top Layer w10: U1.35 827.2,1473.06 889.26,1411 889.26,1289 959.97,1218.29 v1(1013.26,1218.29) ; v1(3043.26,1257) R58.2
  Bottom Layer w10: v1(1013.26,1218.29) 3004.55,1218.29 v1(3043.26,1257)
BOOT0: R7.2 R8.1 R42.2 U1.94 | length 3172.1
  Top Layer w10: R7.2 v1(522.66,2492.6) 768.15,2247.11 U1.94 ; v1(668.26,1006) R42.2
  Bottom Layer w10: v1(522.66,2492.6) 74.86,2492.6 37.26,2455 37.26,1099 130.26,1006 v1(668.26,1006)
BOOT1: R2.2 R14.1 U1.37 | length 871.1
  Top Layer w10: R2.2 v1(803.26,1326) ; U1.37 866.57,1498.73 932.26,1433.04 932.26,1338 971.69,1298.57 1257.09,1298.57 R14.1
  Bottom Layer w10: v1(803.26,1326) 830.26,1299 v1(1012.26,1299)
BUTTON: C53.1 D6.3 R43.1 R45.2 U1.51 | length 3027.1
  Top Layer w10: U1.51 v1(1287.26,1631.78) v1@1287.48,1631.78 ; v1(2238.26,1630) 2286.26,1678 2286.26,2933 2287.26,2933 2484.26,3130 2484.26,3151 v1(2483.26,3152)
  Bottom Layer w10: v1@1287.48,1631.78 2236.48,1631.78 v1(2238.26,1630) ; v1(2483.26,3152) 2483.26,3310 2483.26,3390.6 R45.2 ; R43.1 2540.86,3310 C53.1
CAN1_RX: U1.81 U7.4 | length 2951.1
  Top Layer w10: U1.81 1024.06,2386.8 1034.26,2397 v1(1034.26,2399) ; U7.4 1892.26,844.5 1892.26,1059 2085.26,1252 2085.26,2357 2043.26,2399 v1(2017.26,2399)
  Bottom Layer w10: v1(1034.26,2399) v1(2017.26,2399)
CAN1_TX: U1.82 U7.1 | length 2985.5
  Top Layer w10: U1.82 1004.37,2431.11 1018.26,2445 v1(1034.26,2445) ; v1(2017.26,2445) 2032.26,2445 2114.26,2363 2114.26,863 2079.26,828 U7.1
  Bottom Layer w10: v1(1034.26,2445) v1(2017.26,2445)
CAN_N: P3.3 P6.3 R48.2 U7.6 | length 4662.7
  Top Layer w15: P3.3 1965.52,422.65 1979.26,436.39 U7.6 1979.26,620 1991.76,632.5 1991.76,662.36 2039.4,710 2300.26,710 2347.26,757 v1(2347.26,2832)
  Bottom Layer w15: P6.3 994.58,3516.15 1021.45,3489.28 1021.45,3383.64 1073.1,3332 1109.26,3332 1143.26,3298 1143.26,3121.64 1385.9,2879 2334.26,2879 2347.26,2866 v1(2347.26,2832)
CAN_P: P3.2 P6.2 R48.1 U7.7 | length 4672.4
  Top Layer w15: P3.2 2044.26,422.65 2029.26,437.65 U7.7 2029.26,620 2016.76,632.5 2016.76,652 2049.76,685 2310.62,685 2383.26,757.64 v1(2383.26,2832)
  Bottom Layer w15: P6.2 1073.32,3516.15 1046.45,3489.28 1046.45,3394 1083.45,3357 1119.62,3357 1168.26,3308.36 1168.26,3132 1396.26,2904 2344.62,2904 2383.26,2865.36 v1(2383.26,2832)
DGND: C1.1 C2.2 C4.1 C5.1 C6.2 C8.2 C9.2 C10.2 C12.1 C13.2 C14.2 C15.2 C16.2 C17.2 C18.2 C19.1 C20.1 C21.1 C22.2 C23.2 C24.2 C46.2 C47.2 C48.2 C49.2 C50.2 C51.2 C52.1 C53.2 C54.2 C56.1 C58.1 C59.1 D3.2 D4.1 D5.1 D6.1 D7.1 J1.4 J2.5 J3.5 J6.3 J7.3 P1.4 P3.4 P4.2 P5.2 P6.4 P7.4 P10.4 P13.2 Q1.2 R8.2 R10.2 R13.1 R14.2 R40.1 R47.2 R49.1 R52.1 S1.1 S1.4 U1.10 U1.27 U1.74 U1.99 U2.3 U2.6 U6.1 U7.2 U8.15 Y1.2 Y1.4 Y2.2 Y2.4 | length 2953.4
  Top Layer w10: S1.4 54.86,1268.48 C1.1 ; C6.2 241.46,1836.45 Y1.2@293.37,1888.35 ; C5.1 293.37,1889 Y1.2@293.37,1888.35 ; Y1.4@399.15,1871.65 389.1,1881.7 293.37,1881.7 Y1.2@293.37,1888.35 ; U1.10 669.31,1927.06 688.26,1946 v1(697.26,1946) ; C56.1 645.26,3079.4 U8.15 ; U1.27 669.72,1643.46 v1(691.26,1665) ; 669.72,2221.54 U1.99 669.72,2121.54 680.26,2111 760.26,2111 776.26,2095 v1(776.26,2097) ; v1(1086.26,1992) 1108.26,2014 1108.26,2070 1122.8,2084.54 U1.74 1228.45,2084.54 1292.32,2148.4 C9.2 ; U7.2 2029.26,909.6 C52.1 ; v1(3440.57,2604.68) J7.3 ; v1(3584.26,2604) J6.3
  Top Layer w25: C20.1 C12.1 C19.1 3236.21,916.35 U2.6 U2.3 C21.1@3575.66,785
  Bottom Layer w10: C50.2@348.57,343.31 350.97,345.71 350.97,428.91 363.18,416.69 422.98,416.69 422.98,428.5 485.97,491.5 Y2.2@485.97,503.31 ; v1(691.26,1665) C16.2@691.26,1698.4 ; v1(697.26,1946) 730.86,1946 C14.2 ; C17.2@776.26,2040.4 v1(776.26,2097) ; C18.2@1031.86,1992 v1(1086.26,1992) ; v1(3440.57,2604.68) 3441.26,2604 v1(3584.26,2604)
  Bottom Layer w25: C13.2@774.66,1795 C13.2 v1(835.26,1795) ; v1(967.26,1692) 1014.86,1692 C10.2
  other v1: 1569.26,1524 1621.26,1524 1673.26,1524 225.26,1557 1569.26,1579 1621.26,1579 1673.26,1579 2443.26,2020 2495.26,2020 2547.26,2020 2443.26,2075 2495.26,2075 2547.26,2075 687.26,2540 1955.26,2631 2007.26,2631 2059.26,2631 1404.26,2646 1456.26,2646 1508.26,2646 1955.26,2686 2007.26,2686 2059.26,2686 1404.26,2701 1456.26,2701 1508.26,2701 2408.26,3111 1857.26,3119 2164.26,3164 1421.26,3172 1473.26,3172 1525.26,3172 1421.26,3227 1473.26,3227 1525.26,3227
  other v2: 2137.26,3021 2285.26,3021 1888.26,3022
E-STOP: C54.1 D5.3 R44.1 R46.2 U1.52 | length 2884.5
  Top Layer w10: U1.52 1242.72,1651.46 1253.26,1662 v1@1321.26,1662 ; v1(2216.26,1706) v1(2216.26,3166)
  Bottom Layer w10: v1@1321.26,1662 v1(1322.26,1662) 2172.26,1662 v1(2216.26,1706) ; R46.2 2195.26,3335.4 R44.1 2195.66,3251.86 D5.3 ; v1(2216.26,3166) 2216.26,3231.26 D5.3 ; C54.1 2263.66,3238 D5.3
EN_L: R67.2 U1.38 | length 3218.4
  Top Layer w10: U1.38 886.26,1512 954.26,1444 954.26,1365 980.55,1338.71 v1(1013.26,1338.71) ; v1(2811.26,1347) R67.2@2811.26,2458.6
  Bottom Layer w10: v1@1013.26,1335 2799.26,1335 v1(2811.26,1347)
EN_OUT_L: J4.12 P11.3 R68.1 | length 893.3
  Top Layer w10: J4.12 v1(2762.26,3229) 2762.26,3233 2838.26,3309 2950.26,3309 3060.26,3419 3060.26,3494.78 P11.3
  Bottom Layer w10: R68.1 v1(2762.26,3229)
EN_OUT_R: J5.12 P11.9 R69.1 | length 593.8
  Top Layer w10: J5.12@3193.26,2924.06 v1(3193.26,3229) v1@3193.26,3231
  Bottom Layer w10: P11.9 3117.48,3371.78 3193.26,3296 v1@3193.26,3231 ; R69.1 v1(3193.26,3229)
EN_R: R70.2 U1.91 | length 2690.5
  Top Layer w10: U1.91 827.2,2245.94 v1(844.26,2263) ; v1(3242.26,2279) 3243.26,2280 R70.2
  Bottom Layer w10: v1(844.26,2263) 3226.26,2263 v1(3242.26,2279)
FR_L: R73.2 U1.40 | length 3121.8
  Top Layer w10: U1.40 925.63,1525.63 995.26,1456 995.26,1433 1009.26,1419 v1(1013.26,1419) ; v1(2913.26,1433) R73.2@2913.26,2458.6
  Bottom Layer w10: v1(1013.26,1419) 2899.26,1419 v1(2913.26,1433)
FR_OUT_L: J4.10 P11.4 R74.1 | length 944.1
  Top Layer w10: J4.10 v1(2862.26,3229) 2862.26,3257 2886.26,3281 2965.26,3281 3022.26,3338 3129.26,3338 3176.26,3385 3176.26,3473 3235.59,3532.33 P11.4
  Bottom Layer w10: R74.1 v1(2862.26,3229)
FR_OUT_R: J5.10 P11.10 R75.1 | length 586.3
  Top Layer w10: P11.10 3235.59,3312.67 3293.26,3255 v1(3293.26,3229) J5.10@3293.26,2924.06
  Bottom Layer w10: R75.1 v1(3293.26,3229)
FR_R: R76.2 U1.39 | length 3649.3
  Top Layer w10: U1.39 905.94,1517.31 976.26,1447 976.26,1391 988.4,1378.86 v1(1013.26,1378.86) ; v1(3343.26,1435) R76.2
  Bottom Layer w10: v1(1013.26,1378.86) 3322.12,1378.86 3343.26,1400 v1(3343.26,1435)
IIC2_SCL: U1.47
IIC2_SDA: U1.48
LED_CONTROL: R12.2 U1.97 | length 1946.8
  Top Layer w10: R12.2 94.66,3624.6 180.26,3539 180.26,2464 365.26,2279 668.26,2279 709.09,2238.17 U1.97
NetC1_2: C1.2 D1.1 R1.2 R3.1 S1.2 S1.3 | length 637.6
  Top Layer w10: C1.2 174.09,1299.57 S1.3 S1.2 ; S1.3@176.14,1240 D1.1 277.86,1254.6 R1.2
NetC8_1: C8.1 U1.49 | length 134.6
  Top Layer w10: C8.1@1102.26,1436.4 1102.8,1436.94 U1.49
NetC9_1: C9.1 U1.73 | length 132.4
  Top Layer w10: U1.73 1303.51,2064.85 C9.1
NetC21_2: C21.2 U2.5 | length 97.4
  Top Layer w30: U2.5 C21.2@3577.66,885
NetC46_1: C46.1 D16.1 J2.1 R36.1 | length 889.7
  Top Layer w15: J2.1 587.33,224.93 v1@603.26,209 ; v1(603.26,212) v1@603.26,209 ; v1(880.26,231) 880.26,92 839.26,51 623.26,51 603.26,71 v1@603.26,209
  Bottom Layer w15: C46.1 603.26,160.4 v1(603.26,212) ; v1(880.26,231) 883.04,233.78 R36.1 932.61,296.18 D16.1
NetC47_1: C47.1 R33.2 R34.2 U6.16 | length 259.8
  Bottom Layer w15: U6.16 897.11,756 R33.2 R34.2
NetC48_1: C48.1 U6.4 | length 116.6
  Top Layer w10: v1(703.26,651) C48.1@703.26,719.6
  Bottom Layer w10: U6.4 v1(703.26,651)
NetC49_1: C49.1 J2.0@497.76,141 J2.0@497.76,276.83 J2.0@779.26,141 J2.0@779.26,276.83 R40.2 | length 768.5
  Bottom Layer w10: J2.0@497.76,276.83 497.76,141 497.76,119.5 539.42,77.84 716.1,77.84 J2.0@779.26,141 ; J2.0@779.26,276.83 J2.0@779.26,141 ; C49.1 849.86,64 R40.2 848.86,141 J2.0@779.26,141
NetC50_1: C50.1 U6.7 Y2.3 | length 355.9
  Bottom Layer w15: C50.1@423.37,343.31 466.57,343.31 485.97,362.71 485.97,417.91 Y2.3 536.76,439.5 553.26,456 U6.7
NetC51_1: C51.1 U6.8 Y2.1 | length 217.4
  Bottom Layer w15: C51.1@350.97,503.71 351.37,503.31 422.98,503.31 422.98,543.72 482.26,603 U6.8
NetC55_1: C55.1 U8.1 | length 146.7
  Top Layer w10: C55.1 588.86,2713.6 595.26,2720 U8.1
NetC55_2: C55.2 U8.3 | length 255.4
  Top Layer w10: C55.2 528.26,2819 562.26,2853 674.26,2853 695.26,2832 U8.3
NetC57_1: C57.1 U8.4 | length 89.6
  Top Layer w10: C57.1 U8.4
NetC57_2: C57.2 U8.5 | length 207.7
  Top Layer w10: C57.2 783.86,2632.6 795.26,2644 U8.5
NetC58_2: C58.2 U8.2 | length 90.6
  Top Layer w10: C58.2 U8.2
NetC59_2: C59.2 U8.6 | length 88.6
  Top Layer w10: C59.2 U8.6
NetD2_1: D2.1 LS1.2 R5.1 | length 256.6
  Top Layer w10: D2.1 2375.68,589 LS1.2 LS1.2@2603.66,600.6
NetD3_1: D3.1 R12.1 | length 95.2
  Top Layer w10: R12.1 D3.1
NetD17_2: D17.2 Q3.3 R35.2 | length 322.5
  Top Layer w10: R35.2 412.05,918.39 412.05,986 440.05,1014 Q3.3 475,1105.74 D17.2@537.26,1168
NetJ2_2: J2.2 R37.1 | length 130.1
  Top Layer w10: R37.1 612.92,375.34 J2.2
NetJ2_3: J2.3 R38.1 | length 129.8
  Top Layer w10: J2.3 638.51,376.25 R38.1
NetJ3_1: J3.1 R49.2 | length 264.9
  Top Layer w10: J3.1 1026.26,3090 1104.26,3012 R49.2
NetJ3_2: J3.2 U8.13 | length 376.6
  Top Layer w10: U8.13 745.26,3136 772.26,3163 897.26,3163 917.26,3183 J3.2
NetJ3_3: J3.3 U8.14 | length 286.6
  Top Layer w10: U8.14 695.26,3126 795.26,3226 J3.3
NetJ3_10: J3.10 J3.11 R52.2 | length 1221
  Top Layer w20: J3.10 435.26,3396 1181.26,3396 J3.11
  Bottom Layer w20: J3.11@1293.26,3284 R52.2
NetJ4_2: J4.2 R55.1 | length 135.7
  Top Layer w15: R55.1 J4.2
NetJ4_4: J4.4 R61.1 | length 135.7
  Top Layer w15: R61.1 J4.4
NetJ4_6: J4.6 R67.1 | length 135.7
  Top Layer w15: R67.1 J4.6
NetJ4_8: J4.8 R73.1 | length 135.7
  Top Layer w15: R73.1 J4.8
NetJ5_2: J5.2 R58.1 | length 135.7
  Top Layer w15: R58.1 J5.2@3043.26,2670.13
NetJ5_4: J5.4 R64.1 | length 135.7
  Top Layer w15: R64.1 J5.4@3143.26,2670.13
NetJ5_6: J5.6 R70.1 | length 135.7
  Top Layer w15: R70.1 J5.6@3243.26,2670.13
NetJ5_8: J5.8 R76.1 | length 135.7
  Top Layer w15: R76.1 J5.8@3343.26,2670.13
NetJ6_2: J6.2 R15.2 | length 163.9
  Top Layer w10: J6.2 R15.2
NetJ7_2: J7.2 R79.2 | length 163.8
  Top Layer w10: J7.2 R79.2
NetP4_1: P4.1 R45.1 | length 137.5
  Bottom Layer w10: R45.1 2569.86,3552 P4.1
NetP5_1: P5.1 R46.1 | length 122.5
  Bottom Layer w10: R46.1 2244.86,3552 P5.1
NetP10_2: P10.2 U8.7 | length 1152.4
  Top Layer w10: v1(524.26,2875) 883.26,2875 895.26,2863 U8.7
  Bottom Layer w10: P10.2 505.26,3574.87 505.26,2894 v1(524.26,2875)
NetP10_3: P10.3 U8.8 | length 1250.3
  Top Layer w10: v1(480.26,2906) 481.26,2905 916.26,2905 945.26,2876 U8.8
  Bottom Layer w10: P10.3 424.58,2961.68 v1(480.26,2906)
NetP13_1: P13.1 R32.1 | length 131
  Bottom Layer w10: R32.1 1969.86,3552 P13.1
NetQ1_1: Q1.1 R6.1 | length 109.3
  Top Layer w10: Q1.1 2537.66,890.8 R6.1
NetQ1_3: Q1.3 R5.2 | length 86.4
  Top Layer w10: R5.2 2500.26,680.4 Q1.3
NetQ3_1: Q3.1 R39.1 | length 73.7
  Top Layer w10: Q3.1 567.86,976.26 R39.1
NetQ3_2: Q3.2 R41.2 U6.14 | length 376.5
  Top Layer w10: Q3.2 583.86,1051.4 617.56,1017.7 617.56,987.7 643.26,962 673.26,962 715.26,920 R41.2 ; v1(753.26,858) R41.2@753.26,920
  Bottom Layer w10: U6.14 v1(753.26,858)
NetQ4_1: Q4.1 R41.1 | length 95.7
  Top Layer w10: R41.1@826.92,919.74 826.92,918.68 Q4.1
NetQ4_3: Q4.3 R42.1 | length 139.4
  Top Layer w10: R42.1@832.52,1012.26 R42.1 869.52,1006 Q4.3
NetR39_2: R39.2 U6.13 | length 152
  Top Layer w10: R39.2 683.26,903 703.26,883 v1(703.26,857)
  Bottom Layer w10: U6.13 v1(703.26,857)
NetR47_1: R47.1 U7.8 | length 60.8
  Top Layer w15: U7.8 2139.36,582.5 R47.1
NetR50_1: R50.1 U8.12 | length 91.4
  Top Layer w10: v1(795.26,2946) U8.12
  Bottom Layer w10: R50.1@795.26,2902.4 v1(795.26,2946)
NetR51_1: R51.1 U8.9 | length 66.2
  Top Layer w10: U8.9 1010.81,2993.85 R51.1
OSC_16_N: C6.1 U1.13 Y1.3 | length 346.9
  Top Layer w10: C6.1 311.06,1783.55 354.61,1827.11 374.72,1807 428.26,1807 489.26,1868 U1.13
OSC_16_P: C5.2 U1.12 Y1.1 | length 361.8
  Top Layer w10: C5.2 337.91,1950.25 337.91,1932.89 Y1.1@357.61,1932.89 ; Y1.1 370.72,1949 420.26,1949 481.57,1887.68 U1.12
PG_IN_L: P11.5 R15.1 | length 507.1
  Top Layer w10: P11.5 3412.26,3493.44 3412.26,3323 3485.26,3250 3547.26,3250 3584.26,3213 R15.1
PG_IN_R: P11.11 R79.1 | length 293.5
  Top Layer w10: P11.11 3353.7,3298.56 3440.58,3211.68 R79.1
PG_L: J6.4 R78.1 U1.15 | length 5859.5
  Top Layer w10: v1(136.26,1642) 172.26,1678 373.26,1678 523.89,1828.63 U1.15 ; v1(3566.26,1435) 3566.26,2409 v1(3569.26,2412) ; v1(3569.26,2525) 3578.66,2534.4 R78.1 J6.4
  Bottom Layer w10: v1(136.26,1642) 136.26,1220 223.26,1133 3109.26,1133 3298.26,1322 3494.26,1322 3566.26,1394 v1(3566.26,1435) ; v1(3569.26,2412) v1(3569.26,2525)
PG_R: J7.4 R81.1 U1.16 | length 5663.7
  Top Layer w10: v1@187.26,1637 182.26,1637 v1(187.26,1642) 200.26,1655 374.3,1655 528.25,1808.94 U1.16 ; R81.1@3490.57,2534.72 R81.1 3461.66,2534.4 3432.26,2505 3432.26,2364 3492.26,2304 v1(3492.26,1435)
  Top Layer w15: R81.1@3490.57,2534.72 J7.4
  Bottom Layer w10: v1@187.26,1637 187.26,1238 268.26,1157 3076.26,1157 3269.26,1350 3460.26,1350 3492.26,1382 v1(3492.26,1435)
PROFET_IN: P2.3 U1.2 | length 5164.9
  Top Layer w10: v1(141.26,2084) 141.8,2084.54 U1.2 ; v1(2998.26,975) 2998.26,791 3348,441.26 P2.3
  Bottom Layer w10: v1(141.26,2084) 90.26,2033 90.26,1193 174.26,1109 2947.26,1109 2998.26,1058 v1(2998.26,975)
PROFET_IS: P2.4 U1.32 | length 3397.6
  Top Layer w10: U1.32 768.15,1462.11 844.26,1386 844.26,1259 951.26,1152 v1(951.26,1079) ; v1(2954.26,975) 2954.26,769 3269.26,454 P2.4
  Bottom Layer w10: v1(951.26,1079) 2919.26,1079 2954.26,1044 v1(2954.26,975)
RESET: D17.1 R1.1 U1.14 | length 1296.6
  Top Layer w10: D17.1 535.26,1306.8 513.26,1328.8 443.87,1328.8 R1.1 240.86,1329.4 103.26,1467 103.26,1685 122.26,1704 360.26,1704 504.57,1848.31 U1.14
SV_L: R61.2 U1.25 | length 3375.7
  Top Layer w10: v1(521.26,1517) 521.26,1611 542.04,1631.78 U1.25 ; v1(2711.26,1477) 2712.26,1478 R61.2
  Bottom Layer w10: v1(521.26,1517) 580.26,1458 2692.26,1458 v1(2711.26,1477)
SV_OUT_L: J4.14 P11.2 R62.1 | length 908
  Top Layer w10: J4.14 v1(2662.26,3229) 2662.26,3234 2758.26,3330 2908.26,3330 2939.26,3361 2939.26,3491.89 P11.2
  Bottom Layer w10: R62.1 v1(2662.26,3229)
SV_OUT_R: J5.14 P11.8 R63.1 | length 596.6
  Top Layer w10: J5.14@3096.26,2927.06 v1(3096.26,3229) v1@3096.26,3231
  Bottom Layer w10: P11.8 2999.37,3333.89 3096.26,3237 v1@3096.26,3231 ; R63.1@3096.26,3179.4 v1(3096.26,3229)
SV_R: R64.2 U1.59 | length 2689.9
  Top Layer w10: 1246,1789 1183.76,1789 U1.59 1246,1789.26 1269.26,1766 v1(1287.26,1766) v1@1288.26,1766 ; v1(3140.26,1825) 3143.26,1828 R64.2
  Bottom Layer w10: v1@1288.26,1766 3082.26,1766 3140.26,1824 v1(3140.26,1825)
SYS_SWCLK: J1.3 U1.76 | length 460.1
  Top Layer w10: U1.76 1122.48,2210.52 1137.96,2226 1405.26,2226 1421.26,2242 J1.3
SYS_SWDIO: J1.2 U1.72 | length 1010.9
  Top Layer w10: U1.72 1228.45,2045.17 1255.62,2018 1349.26,2018 1590.26,2259 1590.26,2402 1568.26,2424 1333.26,2424 1321.26,2412 J1.2
U_SENSE: P2.5 U1.33 | length 3292.4
  Top Layer w10: U1.33 787.83,1475.43 867.26,1396 867.26,1268 976.26,1159 976.26,1118 1029.26,1065 v1(1029.26,998) ; v1(2910.26,975) 2910.26,750 3190.52,469.74 P2.5
  Bottom Layer w10: v1(1029.26,998) 2887.26,998 v1(2910.26,975)
UART4_RX: R50.2 U1.79 | length 898.8
  Top Layer w10: v1(795.26,2551) 812.26,2534 1026.26,2534 1063.43,2496.83 U1.79
  Bottom Layer w10: v1(795.26,2551) R50.2@795.26,2827.6
UART4_TX: U1.78 U8.11 | length 1030.7
  Top Layer w10: v1(845.26,2945) U8.11@845.26,2992.85 ; v1(846.26,2567) 854.26,2559 1035.11,2559 1083.11,2511 U1.78
  Bottom Layer w10: v1@845.26,2568 v1(845.26,2945)
UART6_RX: P1.3 U1.64 | length 1853.3
  Top Layer w10: U1.64 1270.94,1887.68 v1(1287.26,1904) ; P1.3 1354.78,438.52 1455.26,539 1455.26,1889 v1(1440.26,1904)
  Bottom Layer w10: v1(1287.26,1904) v1(1440.26,1904)
UART6_TX: P1.2 U1.63 | length 1855.8
  Top Layer w10: U1.63 v1(1322.26,1868) ; P1.2 1433.52,441.26 1509.26,517 1509.26,1852 v1(1493.26,1868)
  Bottom Layer w10: v1@1320.26,1868 v1(1322.26,1868) v1(1493.26,1868)
USART1_RX: U1.69 U6.2 | length 2404.5
  Top Layer w10: v1(801.26,487) 801.26,486 817.26,470 1332.26,470 1409.26,547 1409.26,1944 1367.15,1986.11 U1.69
  Bottom Layer w10: v1(801.26,487) 803.26,489 U6.2
USART1_TX: U1.68 U6.3 | length 2296.2
  Top Layer w10: v1(759.26,533) 771.26,521 1337.26,521 1374.26,558 1374.26,1948 1355.83,1966.43 U1.68
  Bottom Layer w10: U6.3 753.26,539 v1(759.26,533)
USART2_RX: R51.2 U1.87 | length 840.8
  Top Layer w10: v1(891.26,2431) 891.26,2405.68 905.94,2391 U1.87 ; v1(1011.26,2848) R51.2
  Bottom Layer w10: v1(891.26,2431) 908.26,2448 962.26,2448 1011.26,2497 v1(1011.26,2848)
USART2_TX: U1.86 U8.10 | length 841.2
  Top Layer w10: v1(895.26,2944) U8.10 ; v1(925.26,2484) 925.26,2165.61 U1.86
  Bottom Layer w10: v1(895.26,2944) 895.26,2626 925.26,2596 v1(925.26,2484)
USART3_RX: P7.2 U1.56 | length 2302.2
  Top Layer w10: U1.56 v1@1320.46,1730.2 ; v1(1642.26,1732) v1(1642.26,2967)
  Bottom Layer w10: v1(1322.26,1732) v1(1642.26,1732) ; v1(1642.26,2967) 1643.32,2968.06 P7.2
USART3_TX: P7.3 U1.55 | length 2322.3
  Top Layer w10: U1.55 1250.74,1710.52 1262.26,1699 v1(1287.26,1699) v1@1288.26,1699 ; v1(1583.26,1699) 1597.26,1699 1612.26,1714 1612.26,2925 1598.26,2939 v1(1598.26,2968)
  Bottom Layer w10: v1@1288.26,1699 v1(1583.26,1699) ; P7.3 1564.58,3530.68 1598.26,3497 v1(1598.26,2968)
USB_N: R37.2 U6.6 | length 103.2
  Top Layer w10: R37.2@603.26,499.8 v1(603.26,549)
  Bottom Layer w10: v1(603.26,549) U6.6
USB_P: R38.2 U6.5 | length 127.6
  Top Layer w10: R38.2@653.26,493.8 v1(653.26,549)
  Top Layer w15: R38.2@654.26,492.8 R38.2
  Bottom Layer w10: v1(653.26,549) U6.5
VCC_3V3: C10.1 C12.2 C13.1 C14.1 C15.1 C16.1 C17.1 C18.1 C19.2 C20.2 C22.1 C23.1 C24.1 C52.2 C56.2 D1.2 D5.2 D6.2 D7.2 J1.1 J4.1 J4.3 J4.5 J4.7 J5.1 J5.3 J5.5 J5.7 Q4.2 R2.1 R3.2 R4.2 R7.1 R9.2 R31.2 R34.1 R35.1 R43.2 R44.2 R78.2 R81.2 U1.6 U1.11 U1.19 U1.28 U1.50 U1.75 U1.100 U2.4 U7.3 U8.16 | length 14429.3
  Top Layer w10: C15.1 491.87,2005.8 U1.6 649.46,2005.8 v1(673.26,1982) ; R9.2 651.41,1448 689.41,1486 U1.28 690.28,1571.63 690.28,1614.67 723.62,1648 764.26,1648 775.26,1659 v1(775.26,1656) ; U1.19 645.15,1749.89 663.26,1768 v1(663.26,1785.46) ; U1.11 669.89,1907.37 684.26,1893 v1(695.26,1893) ; U1.100 650.04,2111.22 665.26,2096 v1(665.26,2090) ; v1(1079.26,2070) 1079.26,2077 1106.48,2104.22 U1.75 ; v1(1100.26,1643) 1122.48,1620.78 U1.50 ; C52.2 1979.26,897.6 U7.3
  Top Layer w20: v1(480.26,2392) 447.86,2424.4 447.86,3033.6 497.26,3083 C56.2 ; v1(566.86,3143.6) C56.2 ; U8.16 566.86,3022.25 C56.2 ; v1(728.26,1496) 728.26,1405 682.76,1359.5 682.76,1264.5 626.26,1208 404.02,1208 360.62,1164.6 R3.2 293.87,1102.2 D1.2 263.26,991.6 R35.1 336.86,866.4 400.26,803 944.26,803 968.66,827.4 Q4.2 1137.52,851.74 v1(1140.26,849) ; v1(1957.26,973) 1957.26,919.6 C52.2 ; U2.4 3405.26,835 3384.66,855.6 C19.2 C12.2 C20.2 3384.66,1187.4 3450.26,1253 3523.26,1253 3634.26,1364 R78.2
  Top Layer w25: v1(1126.26,3085) 1143.26,3068 v1(1802.26,3068) ; v1(2479.26,3034) 2479.26,2904 2633.26,2750 ; J4.1 2562.26,2730 2582.26,2750 2633.26,2750 ; J4.3 2662.26,2727 2685.26,2750 ; J4.5 2762.26,2728 2784.26,2750 ; J4.7 2862.26,2728 2884.26,2750 ; J5.1@2993.26,2670.13 2993.26,2724 3019.26,2750 ; J5.3@3093.26,2670.13 3093.26,2725 3118.26,2750 ; J5.5@3193.26,2670.13 3193.26,2723 3220.26,2750 ; J5.7@3293.26,2670.13 3293.26,2719 3324.26,2750 ; R81.2 R78.2 3667.86,2459.6 3701.26,2493 3701.26,2700 3651.26,2750 3324.26,2750 ; 2633.26,2750 2685.26,2750 ; 2685.26,2750 2784.26,2750 ; 2784.26,2750 2884.26,2750 ; 2884.26,2750 3019.26,2750 ; 3019.26,2750 3118.26,2750 ; 3118.26,2750 3220.26,2750 ; 3220.26,2750 3324.26,2750
  Bottom Layer w10: R4.2 612.26,1584 661.26,1633 ; v1(663.26,1785.46) 703.31,1785.46 C13.1 ; v1(695.26,1893) C14.1@751.86,1893 ; v1(775.26,1656) 775.26,1707.6 C16.1@777.66,1710 ; C18.1@1033.86,2070 v1(1079.26,2070) ; R34.1 R34.1@1086.66,849 ; v1(1100.26,1643) C10.1@1100.26,1681.4 ; 1825.26,3068 1757.26,3136 1757.26,3301 1777.26,3321 R31.2 1826.86,3252.54 D7.2 ; D5.2 2120.86,3279.26 R44.2 2071.26,3285.4 2071.26,3132 2135.26,3068 ; 2388.26,3068 2356.26,3100 2356.26,3290 2376.26,3310 R43.2 2406,3307.14 D6.2
  Bottom Layer w20: v1(480.26,2392) 534.86,2392 C22.1 ; v1(566.86,3143.6) 1067.66,3143.6 v1(1126.26,3085) ; C17.1 533.86,2208 C23.1 535.86,2246 C22.1 ; v1(728.26,1496) 728.26,1640 ; R34.1@1086.66,849 v1(1140.26,849) 1750.26,849 1874.26,973 v1(1957.26,973) ; J1.1 803.26,2345 699.26,2449 570.26,2449 535.86,2414.6 C22.1
  Bottom Layer w25: v1(1802.26,3068) 1825.26,3068 2135.26,3068 2388.26,3068 2445.26,3068 v1(2479.26,3034)
VCC_5V: C3.2 C4.2 C11.2 D2.2 D16.2 J6.1 J7.1 LS1.1 P1.1 P2.1 P3.1 P6.1 P7.1 R11.2 R33.1 R36.2 R56.2 R57.2 R62.2 R63.2 R68.2 R69.2 R74.2 R75.2 U2.1 U2.2 | length 12020.9
  Top Layer w10: v1(774.26,1203) 851.26,1203 888.26,1166 888.26,1041 921.98,1007.28 968.98,1007.28 1010.26,966 1010.26,933 1030.26,913 1116.26,913 1174.26,855 v1(1174.26,778)
  Top Layer w25: v1(3490.26,3024.63) 3490.57,3024.31 J7.1 ; 3505.48,709.83 3625.09,709.83 3773.26,858 3773.26,2770 3634.26,2909 J6.1 v1(3634.26,3017)
  Top Layer w39.37: v1(1305.26,3579) v1(1759.26,3579) ; v1(1512.26,258) P1.1 ; P3.1 2123,243.26 v1(2140.26,226) ; D2.2 2375.26,269 v1(2419.26,225) ; C4.2 2714.66,268.6 v1(2758.26,225) ; v1(3505.48,257.22) P2.1 3505.48,685 3505.48,709.83
  Bottom Layer w10: R11.2 282.66,1216.6 295.26,1204 777.26,1204 778.26,1203 v1(774.26,1203) ; R33.1 1152.26,756 v1(1174.26,778)
  Bottom Layer w25: R75.2 3469.26,3101.6 ; v1(3490.26,3024.63) 3490.26,3080.6 3469.26,3101.6 ; v1(3634.26,3017) 3549.66,3101.6 3469.26,3101.6
  Bottom Layer w39.37: R33.1 1081.66,376.64 D16.2 1035.8,262.17 R36.2 1488.04,233.78 v1(1512.26,258) 1545.26,225 v1@2140.26,225 ; P6.1 1154.26,3579 v1(1305.26,3579) ; P7.1 1724.26,3579 v1(1759.26,3579) 1759.26,3521 1692.26,3454 1692.26,2995 1720.26,2967 2516.26,2967 2562.26,3013 R56.2 R62.2 R68.2 R74.2 R57.2 R63.2 R69.2 R75.2 ; v1@2143.26,225 v1(2419.26,225) v1(2758.26,225) 3473.26,225 v1(3505.48,257.22)
VREF+: D4.2 R4.1 R11.1 R13.2 U1.21 | length 560
  Top Layer w10: v1(496.26,1687) 495.26,1687 518.78,1710.52 U1.21
  Bottom Layer w10: R11.1 282.66,1534.6 R13.2 288.86,1540.8 380.66,1540.8 496.26,1656.39 ; v1(496.26,1687) 496.26,1656.39 ; R4.1 496.26,1596.6 496.26,1656.39
pads on no net: J2.0@559.77,224.66 J2.0@717.25,224.66 J2.4 J3.4 J3.6 J3.7 J3.8 J3.9 P1.0 P2.0 P3.0 P4.0 P5.0 P6.0 P7.0 P10.0 P10.1 P11.0 P13.0 U1.1 U1.3 U1.4 U1.7 U1.8 U1.9 U1.17 U1.18 U1.23 U1.24 U1.26 U1.29 U1.30 U1.31 U1.34 U1.41 U1.42 U1.43 U1.44 U1.45 U1.46 U1.53 U1.54 U1.57 U1.58 U1.60 U1.66 U1.67 U1.70 U1.71 U1.77 U1.80 U1.83 U1.84 U1.85 U1.88 U1.89 U1.90 U1.92 U1.93 U1.95 U1.96 U1.98 U6.9 U6.10 U6.11 U6.12 U6.15 U7.5

## Polygon pours and split planes (outlines as drawn)
DGND on Bottom Layer "Bottom Layer-No Net" (solid, remove dead copper, pour order 14): -531.98,4443.76 -531.98,77.76 -133.98,-320.24 1.02,-185.24 4451.02,-185.24 4451.02,4331.76 4490.02,4370.76
VCC_3V3 on Bottom Layer "Bottom Layer-No Net" (solid, remove dead copper, pour order 0): 640.2,2114.06 640.2,1621.94 1132.32,1621.94 1132.32,2114.06
DGND on Top Layer "Bottom Layer-No Net" (solid, remove dead copper, pour order 12): -365.74,4222 -259.74,4116 -259.74,-295 3870.26,-295 4151.26,-14 4078.26,59 4078.26,4194

## Keep-outs
Keep-Out Layer:
  the board outline again, w10

## Other copper
Top Layer:
  rectangle net VCC_5V: 3439.26,672 3526.26,747
Multi-Layer:
  pour cut-out: 361.76,1981.5 252.26,1872 338.26,1786 447.76,1895.5

## Silkscreen, mask and mechanical layers (free items; w line width, h text height)
Top Overlay:
  drawing of 3879 lines, arcs and shapes, not listed
  text "2018-5-8" at 2978.26,1413 h40
  text "BooMo_Con_V2.0" at 2125.26,1410 h40
Mechanical 1:
  the board outline again, w10